# Altium PCB 20200902shidu.PcbDoc
Units mm, origin at the board's own origin, x right, y up, seen from the top; angles counter-clockwise.
Board outline 152.4 x 101.6 mm, 2 copper layers (Top Layer, Bottom Layer); 71 components, 55 nets, 213 pads, 23 vias.
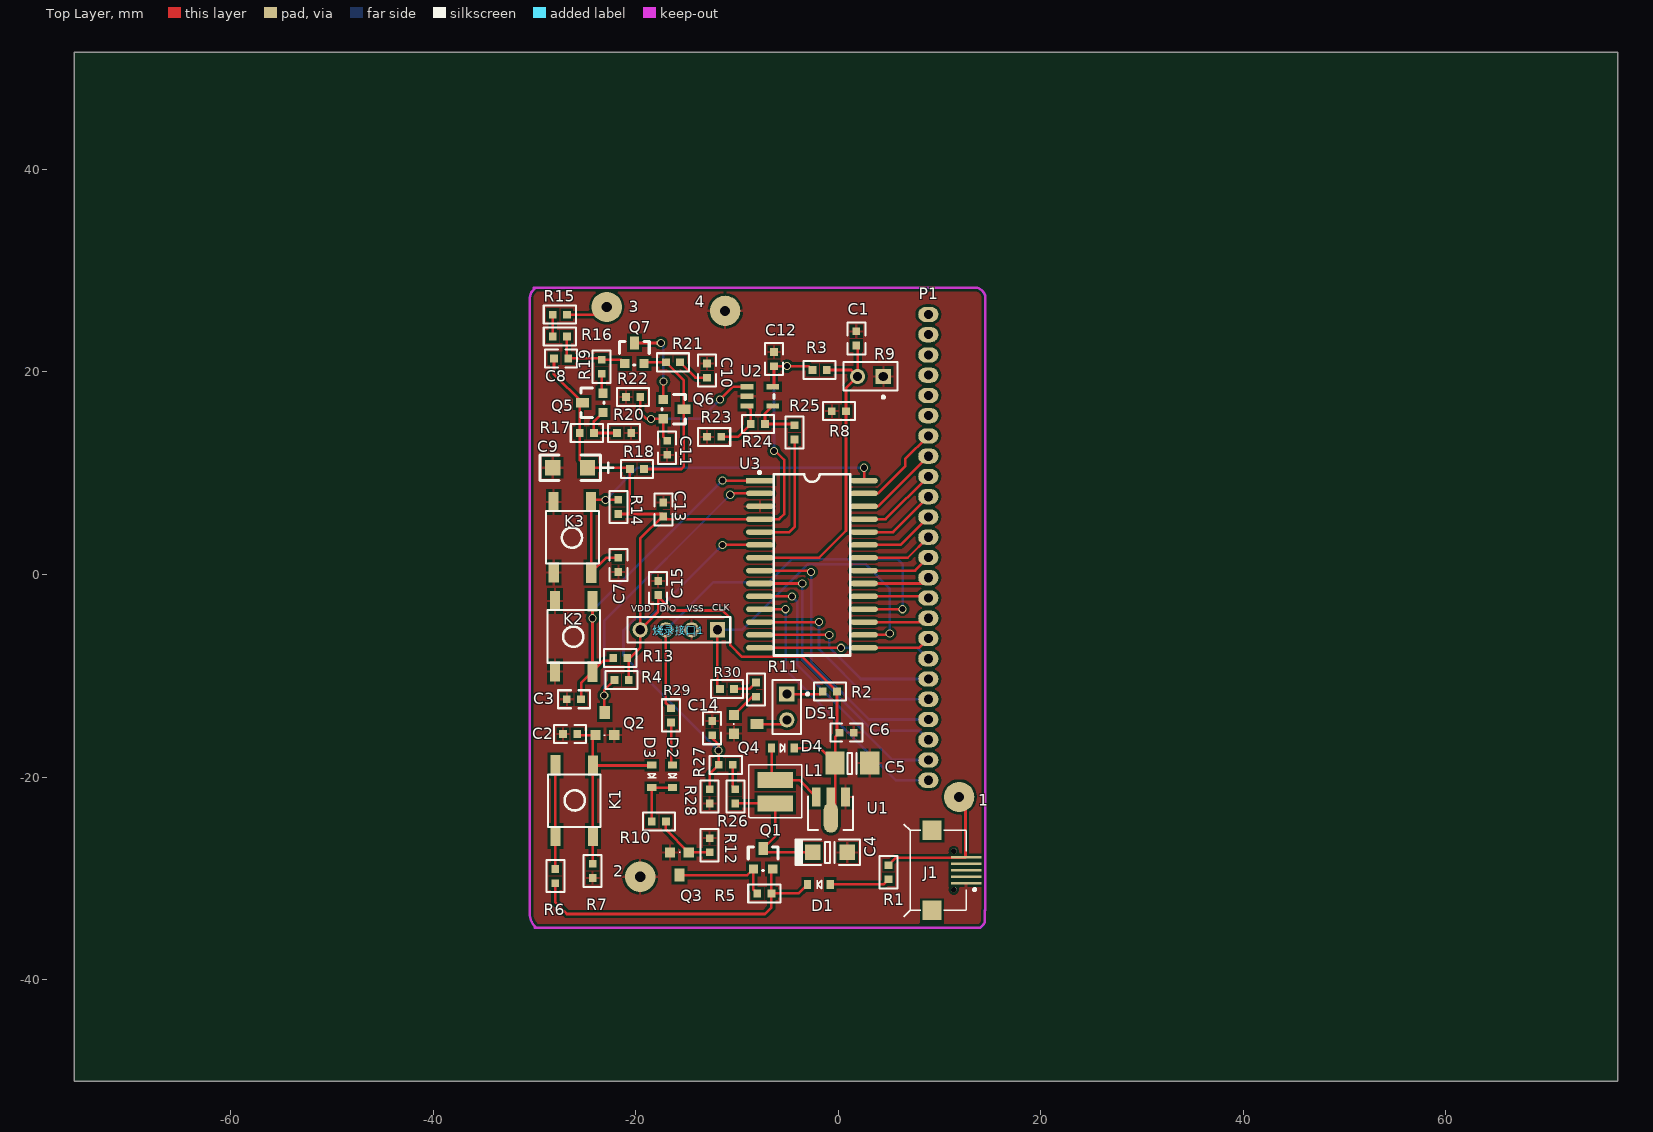
[diagram p0: Top Layer view]
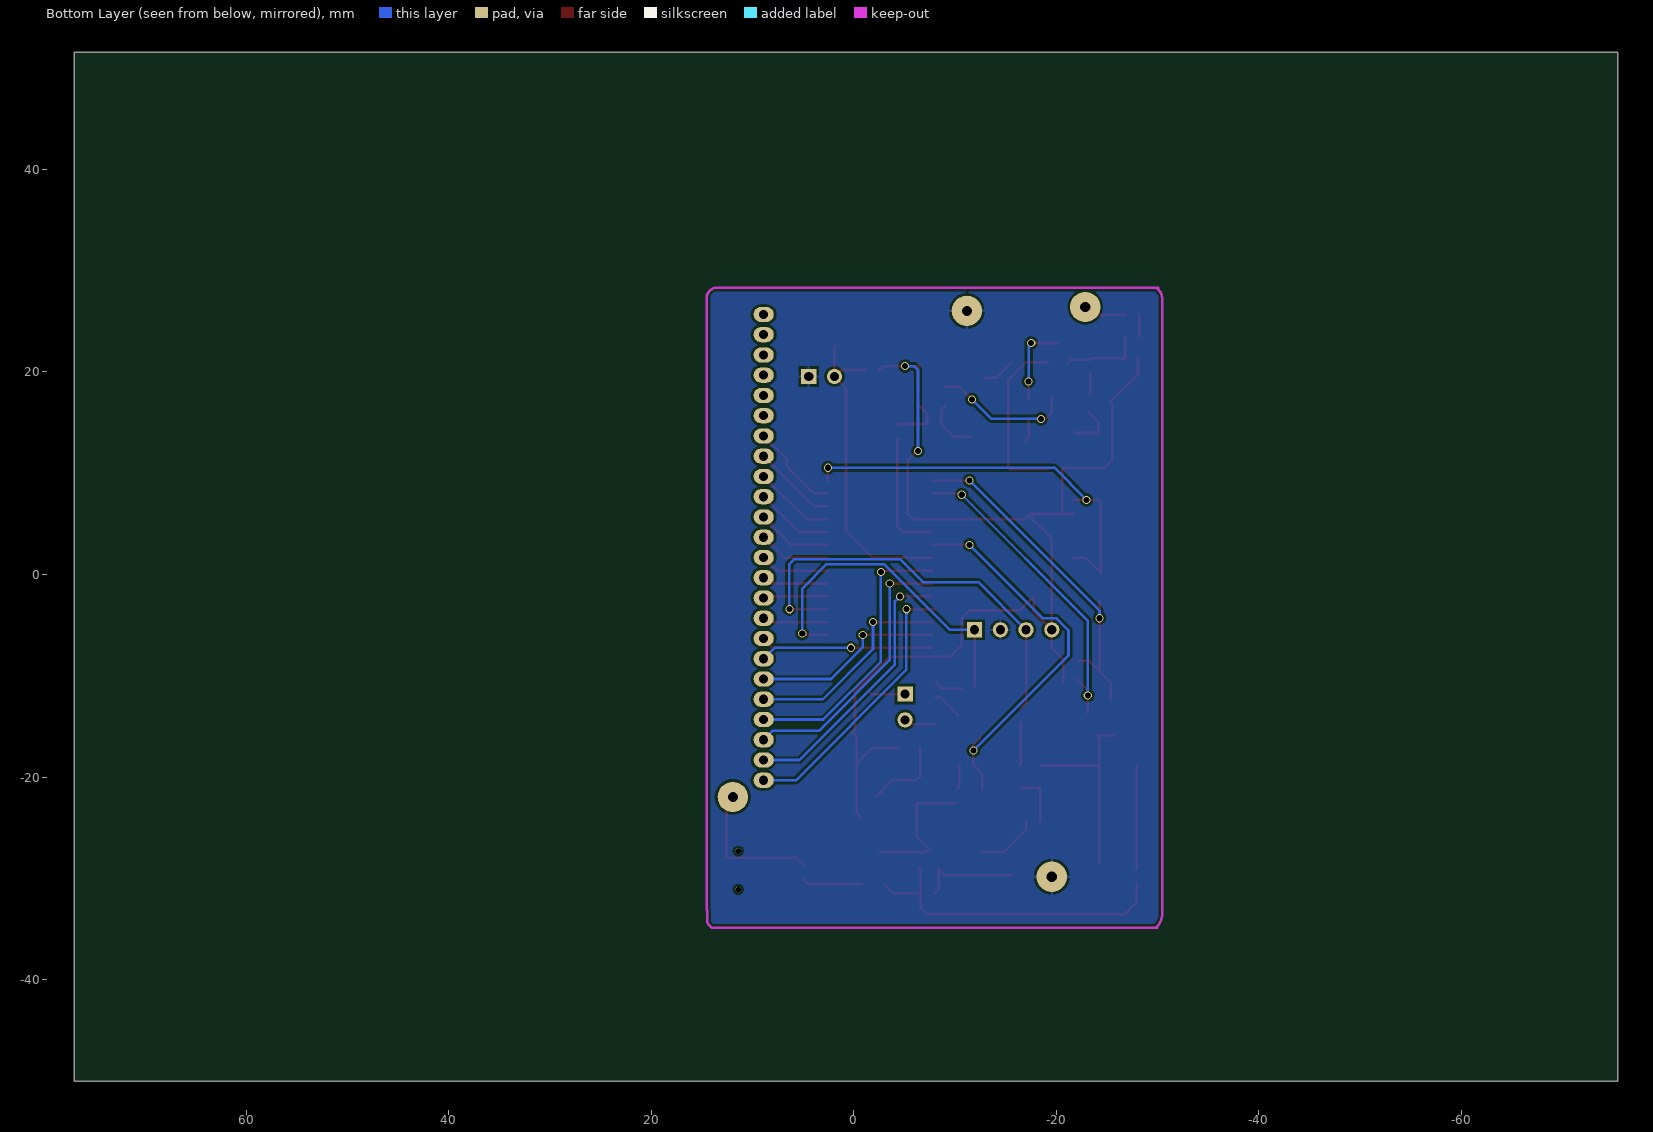
[diagram p1: Bottom Layer view, seen from below]

## Layer stack, top to bottom
Top Layer: signal copper 0.0356
Dielectric: dielectric 0.32, FR-4, Dk 4.8
Bottom Layer: signal copper 0.0356

## Board outline
-75.438,-50.038 76.962,-50.038 76.962,51.562 -75.438,51.562

## Design rules (kind name [scope] priority, off if disabled: settings)
Clearance [All] p1: gap=0.254
FabricationTestPointUsage TestPointUsage [All] p1: valid=0 allowmultiple=FALSE
FabricationTestpoint Testpoint [All] p1: side=3 testpointundercomponent=TRUE minsize=1.016 maxsize=2.54 preferedsize=1.524 minholesize=0 maxholesize=1.016 preferedholesize=0.813 testpointgrid=0.025 allowsidetop=TRUE allowsidebottom=TRUE usegrid=TRUE gridtolerance=0
PolygonConnect [All] p1: connectstyle=Relief reliefconductorwidth=0.254 reliefentries=4 polygonreliefangle="90 Angle" airgapwidth=0.254
RoomDefinition 20200831shidu [InComponentClass('20200831shidu')] p1: confinementstyle=ConfineIn formatcopy=TRUE lockcomponents=FALSE outline -100.838,-75.438 -50.038,-75.438 -50.038,-50.038 -100.838,-50.038
RoutingVias [All] p1: holewidth=0.508 width=0.762 viastyle="Through Hole" minholewidth=0.508 minwidth=0.762 maxholewidth=0.711 maxwidth=1.27
SolderMaskExpansion [All] p1: expansion=0.102
Width [All] p1: maxlimit=0.762 minlimit=0.254 preferedwidth=0.254
26 further rules are at their usual default settings.

## Components (designator, comment, footprint, x,y, rotation, side; value= is the part's Value field where it differs from the comment)
1 "" PADD 11.938,-21.971 r90 top
2 "" PADD -19.558,-29.845 r90 top
3 "" PADD -22.86,26.416 r90 top
4 "" PADD -11.176,26.035 r90 top
C1 "100nF" c0603 1.778,23.749 r180 top
C2 "100nF" c0603 -26.924,-15.748 r270 top
C3 "100nF" c0603 -26.543,-12.319 r270 top
C4 "106/16V" 1206C-T -2.54,-27.432 r0 top
C5 "107/16V" 3528B 1.524,-18.542 r90 top
C6 "100nF" c0603 1.27,-15.621 r90 top
C7 "100nF" c0603 -21.717,0.508 r0 top
C8 "4.7nF" c0603 -27.813,21.336 r270 top
C9 "106" 1206C -24.765,10.541 r180 top
C10 "101" c0603 -12.954,19.685 r0 top
C11 "47nf" c0603 -16.891,12.954 r180 top
C12 "100nF" c0603 -6.35,20.828 r0 top
C13 "100nF" c0603 -17.272,6.858 r180 top
C14 "100nF" c0603 -12.446,-14.732 r180 top
C15 "100nF" c0603 -17.78,-0.889 r180 top
D1 "B5819ws" SOD-323_B5819WS -1.905,-30.607 r180 top
D2 "B5819ws" SOD-323_B5819WS -16.383,-19.939 r270 top
D3 "B5819ws" SOD-323_B5819WS -18.415,-19.939 r270 top
D4 "SS14" SOD-323_B5819WS -5.461,-17.145 r0 top
DS1 "Lamp" PIN2 -5.08,-11.811 r270 top
J1 "Micro USB" Micro_USB 7.112,-29.21 r180 top
K1 "POWER" AN4*4-SMD -26.035,-22.225 r180 top
K2 "POWER" AN4*4-SMD -26.162,-6.223 r0 top
K3 "POWER" AN4*4-SMD -26.289,3.556 r0 top
L1 "10uH" "CD32 - duplicate" -6.223,-22.606 r90 top
P1 "Header 17" 24p-2.0 8.89,-20.32 r90 top
Q1 "2SA812" SOT-23 -8.382,-29.083 r0 top
Q2 "9013" SOT-23_S9013_J3_NPN -22.987,-14.986 r90 top
Q3 "S9013" SOT-23_S9013_J3_NPN -15.748,-28.321 r270 top
Q4 "S9013" SOT-23_S9013_J3_NPN -9.398,-14.859 r0 top
Q5 "2SC1623" SOT-23 -23.241,16.002 r90 top
Q6 "2SC1623" SOT-23 -17.272,17.272 r270 top
Q7 "2SA812" SOT-23 -21.082,20.828 r0 top
R1 "0" 0603R 4.953,-30.099 r90 top
R2 "50R" 0603R -0.127,-11.557 r180 top
R3 "100K  1%" 0603R -2.54,20.193 r0 top
R4 "300k" 0603R -20.701,-10.414 r180 top
R5 "300K" 0603R -8.001,-31.496 r0 top
R6 "20k" 0603R -27.94,-29.083 r270 top
R7 "100k" 0603R -24.257,-29.972 r90 top
R8 "100K 1%" 0603R 0.762,16.129 r180 top
R9 "NTC" PIN2 4.445,19.558 r180 top
R10 "10K" 0603R -17.018,-24.384 r180 top
R11 "100k" 0603R -8.128,-12.065 r90 top
R12 "300K" 0603R -12.7,-26.035 r270 top
R13 "100k" 0603R -20.828,-8.255 r180 top
R14 "100k" 0603R -21.717,5.969 r90 top
R15 "9.1K  1%" 0603R -28.194,25.654 r0 top
R16 "20K 1%" 0603R -26.797,23.495 r180 top
R17 "240R" 0603R -24.13,13.97 r180 top
R18 "10K" 0603R -19.177,10.414 r180 top
R19 "1K 1%" 0603R -23.368,19.812 r90 top
R20 "5.1K" 0603R -20.447,13.97 r180 top
R21 "0R" 0603R -17.018,20.955 r0 top
R22 "15K" 0603R -19.558,17.526 r180 top
R23 "20K  1%" 0603R -11.557,13.589 r180 top
R24 "10K 1%" 0603R -7.239,14.859 r180 top
R25 "0R" 0603R -4.318,13.335 r90 top
R26 "300K" 0603R -10.16,-21.209 r270 top
R27 "300K" 0603R -11.811,-18.796 r0 top
R28 "100K" 0603R -12.7,-22.606 r90 top
R29 "0" 0603R -16.51,-14.605 r90 top
R30 "0" 0603R -10.287,-11.303 r180 top
U1 "QX2303L50E" SOT-89 -0.762,-23.368 r0 top
U2 "LM321" SOT-25_ -6.477,16.637 r90 top
U3 "SC92F7543M28U" SOP-28 -7.747,9.271 r0 top
烧录接口1 "Header 4" HDR1X4 -11.938,-5.461 r180 top

## Footprints (in the part's own frame and the unit in brackets; to place one, negate y for a bottom-side part, rotate by r counter-clockwise, add the part's x,y. Pads: shape width x height; smd on the part's side, far side on the other; paste and mask are expansions set on the pad)
24p-2.0 [mm]
  oval 1.5x2 hole 0.9: 1(0,0) 2(2,0) 3(4,0) 4(6,0) 5(8,0) 6(10,0) 7(12,0) 8(14,0) 9(16,0) 10(18,0) 11(20,0) 12(22,0) 13(24,0) 14(26,0) 15(28,0) 16(30,0) 17(32,0) 18(34,0) 19(36,0) 20(38,0) 21(40,0) 22(42,0) 23(44,0) 24(46,0)
0603R [mil]
  rect 30x30 smd: 1(0,0) 2(55,0)
  silkscreen extent -35,-35 90,35
1206C [mil]
  rect 60x60 smd: 1(0,0) 2(135,0)
  silkscreen extent -100,-50 185,50
1206C-T [mil]
  rect 60x60 smd: 1(-0.04,-0.04) 2(134.96,-0.04)
  silkscreen extent -67,-50 185,50
3528B [mm]
  rect 2.28x1.9 smd: 1(-0.082,1.839) 2(-0.082,-1.581)
  silkscreen extent -1.16,-0.28 0.93,0.63
AN4*4-SMD [mm]
  rect 1x2 smd: 1(1.89,3.59) 1(1.896,-3.376) 2(-1.814,3.603) 2(-1.808,-3.363)
  silkscreen extent -2.56,-2.49 2.64,2.71
c0603 [mil]
  rect 30x30 smd: 1(0.04,44.96) 2(0.04,-10.04)
  silkscreen extent -35,-45 35,80
"CD32 - duplicate" [mm]
  rect 1.6x3.5 smd: 1(0,0) 2(2.3,0)
  silkscreen extent -1.41,-2.62 3.83,2.6
HDR1X4 [mm] "Connector; Header; 4 Position"
  rect 1.5x1.5 hole 0.9: 1(0,0)
  round 1.5 hole 0.9: 2(2.54,0) 3(5.08,0) 4(7.62,0)
  silkscreen extent -1.27,-1.27 8.89,1.27
Micro_USB [mm] "5P 贴片 带定位柱"
  rect 3x0.25 smd: 1(-5.508,1.3) 2(-5.508,0.65) 3(-5.508,0) 4(-5.508,-0.65) 5(-5.508,-1.3)
  round 0.55 hole 0.55 unplated: MH1(-4.3,1.9) MH2(-4.3,-1.9)
  rect 1.9x1.9 smd: ""(-2.15,3.95) ""(-2.15,-3.95)
  silkscreen extent -6.47,-4.57 0.63,4.57
PADD [mm]
  round 3 hole 1: 1(0,0)
PIN2 [mm] "Photosensitive Diode; 2 Leads"
  rect 1.5x1.5 hole 0.9: 1(0,0)
  round 1.5 hole 0.9: 2(2.54,0)
  silkscreen extent -1.4,-1.4 3.94,2.18
SOD-323_B5819WS [mm]
  rect 0.7x0.9 smd: 1(-1.115,0) 2(1.115,0)
  silkscreen extent -0.25,-0.41 0.15,0.43
SOP-28 [mm]
  rect 2.7x0.55 smd: 1(0,0)
  oval 2.7x0.55 smd: 2(0,-1.27) 3(0,-2.54) 4(0,-3.81) 5(0,-5.08) 6(0,-6.35) 7(0,-7.62) 8(0,-8.89) 9(0,-10.16) 10(0,-11.43) 11(0,-12.7) 12(0,-13.97) 13(0,-15.24) 14(0,-16.51) 15(10.3,-16.51) 16(10.3,-15.24) 17(10.3,-13.97) 18(10.3,-12.7) 19(10.3,-11.43) 20(10.3,-10.16) 21(10.3,-8.89) 22(10.3,-7.62) 23(10.3,-6.35) 24(10.3,-5.08) 25(10.3,-3.81) 26(10.3,-2.54) 27(10.3,-1.27) 28(10.3,0)
  silkscreen extent -0.14,-17.27 8.92,0.92
SOT-23 [mil]
  rect 36x36 smd: 1(0,0) 2(75,0)
  rect 36x50 smd: 3(38,80)
  silkscreen extent -20,-5 95,85
SOT-23_S9013_J3_NPN [mm]
  rect 1x1 smd: B(-0.881,0.981) E(-0.881,-0.863)
  rect 1.3x1 smd: C(1.369,0.077)
  silkscreen extent -0.91,0.03 -0.91,0.15
SOT-25_ [mil]
  rect 20x50 smd: 1(75,100) 2(38,100) 3(0,100) 4(0,0) 5(75,0)
  silkscreen extent 30,-5 45,-5
SOT-89 [mil] "3A"
  rect 34x75 smd: 1(58.06,55.19) 2(1.06,55.19) 3(-55.94,55.19)
  oval 55.12x118.11 smd: 2(1.06,-24.81)
  silkscreen extent -87,-74 88,56

## Part data
1 2 3 4: library part CON1, "Connector"
C1 C2 C3 C6 C7 C8 C10 C11 C12 C13 C14 C15: library part CAP, "Capacitor"
C4: library part ELECTRO1, "Electrolytic Capacitor"
C5: library part CAP-TYPE1
C9: library part CAPACITOR, "Capacitor"
D1 D2 D3 D4: library part "Diode 11DQ03", "Schottky Rectifier"
DS1: "Incandescent Bulb"
J1: library part USB_AB
K1 K2 K3: library part SW-PB
L1: library part "Inductor Iron", "Magnetic-Core Inductor"
P1: "Header, 17-Pin"
Q1 Q7: library part PNP, "PNP Transistor"
Q2: library part 2N3904, "NPN General Purpose Amplifier"
Q3 Q4 Q5 Q6: library part NPN, "NPN Transistor"
R1 R15 R16 R17 R18 R19 R20 R21 R22 R23 R24 R25 R26 R27 R28 R29 R30: library part RES1
R2 R3 R4 R5 R6 R7 R8 R10 R11 R12 R13 R14: library part RES, "Resistor"
R9: library part "Res Adj2", "Variable Resistor"
U1: library part MCC6288
U2: library part LVM321
U3: library part SC92F7547
烧录接口1: "Header, 4-Pin"

## Via types
v1: diameter 0.8, hole 0.6, Top Layer to Bottom Layer, 23 vias

## Nets (pads, with @x,y where several pads share a name; then routed paths per layer and width w, separated by ;. In a path a pad name is that pad's centre, name@x,y a point inside that pad or via, vN(x,y) a via of type N, cw(c..) or ccw(c..) an arc to the next point about the centre after c; other vN are vias at no path point)
BAT3V: 1.1 J1.5 R1.2 | length 14.2
  Top Layer w0.254: R1.2 5.689,-27.966 12.564,-27.966 12.564,-22.597 1.1
BAT(ADC): C14.1 R27.1 R28.2 U3.6 | length 38.4
  Top Layer w0.254: R28.2 -12.7,-19.685 R27.1 v1(-11.811,-17.399) -11.811,-16.764 C14.1@-12.447,-16.128 ; v1(-11.43,2.921) U3.6
  Bottom Layer w0.254: v1(-11.811,-17.399) -21.209,-8.001 -21.209,-5.513 -20.026,-4.33 -18.681,-4.33 v1(-11.43,2.921)
BL_LED: R11.2 R30.1 | length 2.7
  Top Layer w0.254: R30.1@-10.541,-11.303 -8.763,-11.303 R11.2
COM1: P1.1 U3.11 | length 27.4
  Top Layer w0.254: U3.11@-8.001,-3.429 U3.11 v1(-5.207,-3.429)
  Bottom Layer w0.254: v1(-5.207,-3.429) -5.207,-9.398 5.715,-20.32 P1.1
COM2: P1.2 U3.10 | length 27
  Top Layer w0.254: U3.10 v1(-4.572,-2.159)
  Bottom Layer w0.254: v1(-4.572,-2.159) -4.064,-2.667 -4.064,-8.89 5.366,-18.32 P1.2
COM3: P1.3 U3.9 | length 27.5
  Top Layer w0.254: U3.9 v1(-3.556,-0.889)
  Bottom Layer w0.254: v1(-3.556,-0.889) -3.556,-8.465 3.43,-15.451 8.021,-15.451 P1.3
COM4: P1.4 U3.8 | length 28.2
  Top Layer w0.254: U3.8 v1@-2.54,0.381
  Bottom Layer w0.254: v1@-2.54,0.381 v1(-2.686,0.235) -2.686,-8.617 3.017,-14.32 P1.4
HARDWARE_POWER: C2.1 D3.1 K1.2 Q2.B R7.2 | length 20.5
  Top Layer w0.254: C2.1 -25.664,-15.867 Q2.B -24.227,-16.126 K1.2@-24.227,-18.862 ; R7.2 -24.257,-25.864 -24.221,-25.828 -24.227,-25.822 K1.2@-24.227,-18.862 ; D3.1 -18.453,-18.862 K1.2@-24.227,-18.862
K1(POWER): Q2.C R4.2 U3.2 | length 31.6
  Top Layer w0.254: Q2.C -23.114,-13.567 v1(-23.114,-11.938) -23.114,-11.43 R4.2 ; v1(-10.668,7.874) -10.541,8.001 U3.2
  Bottom Layer w0.254: v1(-23.114,-11.938) -23.114,-4.572 v1(-10.668,7.874)
K2(HOLD): C3.1 K2.1 R13.2 U3.1 | length 35.2
  Top Layer w0.254: C3.1 -25.401,-10.734 K2.1@-24.266,-9.599 ; K2.1@-24.272,-2.633 -24.266,-2.639 v1(-24.266,-4.318) K2.1@-24.266,-9.599 ; R13.2@-22.225,-8.509 -23.176,-8.509 K2.1@-24.266,-9.599 ; v1(-11.43,9.271) U3.1
  Bottom Layer w0.254: v1(-24.266,-4.318) -24.266,-3.565 v1(-11.43,9.271)
K3(MODE): C7.1 K3.1 R14.2 U3.28 | length 41.1
  Top Layer w0.254: R14.2 v1(-22.987,7.366) -24.179,7.366 -24.399,7.146 -24.393,7.14 -24.393,0.18 -22.923,1.65 C7.1 ; v1(2.54,10.541) 2.553,10.528 U3.28
  Bottom Layer w0.254: v1(-22.987,7.366) -19.812,10.541 v1(2.54,10.541)
Net3_1: 3.1 R15.2 | length 4.1
  Top Layer w0.254: R15.2 -23.241,25.654 3.1@-22.86,26.035
NetC8_1: C8.1 Q7.1 R16.1 R19.2 | length 8
  Top Layer w0.254: R16.1 -26.797,21.461 C8.1 -23.494,21.335 R19.2 -21.463,21.209 Q7.1
NetC10_2: C10.2 R21.2 | length 3.3
  Top Layer w0.254: R21.2 -14.096,19.43 C10.2
NetC11_2: C11.2 Q6.2 R22.1 U2.1 | length 17.2
  Top Layer w0.254: R22.1 -19.558,16.002 -18.923,15.367 v1(-18.479,15.367) Q6.2 -17.272,13.589 C11.2 ; v1(-11.684,17.272) -10.414,18.542 U2.1
  Bottom Layer w0.254: v1(-18.479,15.367) -13.589,15.367 v1(-11.684,17.272)
NetD1_1: D1.1 R1.1 | length 6
  Top Layer w0.254: D1.1 4.445,-30.607 R1.1
NetD2_2: D2.2 D3.2 R10.2 | length 5.4
  Top Layer w0.254: R10.2 D3.2 D2.2
NetD4_1: D4.1 L1.2 U1.3 | length 8
  Top Layer w0.254: D4.1 -6.576,-19.953 L1.2 -3.843,-20.306 U1.3
NetDS1_1: DS1.1 R2.2 | length 3.7
  Top Layer w0.254: DS1.1 -1.778,-11.811 R2.2
NetDS1_2: DS1.2 Q4.C | length 3.1
  Top Layer w0.254: Q4.C -5.511,-14.782 DS1.2
NetK1_1: K1.1 R6.1 | length 10.2
  Top Layer w0.254: R6.1 -27.94,-25.83 -27.931,-25.821 K1.1@-27.931,-18.849
NetQ1_1: Q1.1 Q3.C R5.1 | length 10.1
  Top Layer w0.254: Q3.C -8.989,-29.69 Q1.1 -8.382,-31.115 R5.1
NetQ3_B: Q3.B R10.1 R12.2 | length 6.1
  Top Layer w0.254: R10.1 -17.018,-25.189 Q3.B -12.708,-27.44 R12.2
NetQ4_B: Q4.B R11.1 | length 2.9
  Top Layer w0.254: Q4.B -8.466,-12.065 R11.1
NetQ5_1: Q5.1 R17.1 R20.2 | length 4.7
  Top Layer w0.254: Q5.1 -24.13,15.113 R17.1 R20.2
NetQ5_2: Q5.2 R19.1 | length 2
  Top Layer w0.254: R19.1 -23.368,18.034 Q5.2
NetQ6_1: Q6.1 Q7.3 | length 8.3
  Top Layer w0.254: Q7.3 v1(-17.526,22.86) ; Q6.1 v1(-17.272,19.05)
  Bottom Layer w0.254: v1(-17.526,22.86) -17.272,22.606 v1(-17.272,19.05)
NetR15_1: R15.1 R16.2 | length 2.2
  Top Layer w0.254: R16.2 R15.1
NetR23_1: R23.1 R24.2 U2.3 | length 5.4
  Top Layer w0.254: R23.1 -9.906,13.589 R24.2 -8.636,16.256 U2.3
NetR24_1: R24.1 R25.2 U2.4 | length 5.1
  Top Layer w0.254: U2.4 -7.239,15.875 R24.1 -4.445,14.859 R25.2
NetR26_1: R26.1 R27.2 | length 2.5
  Top Layer w0.254: R27.2 -10.414,-20.955 R26.1
NTC(ADC): C1.1 R3.2 R8.1 R9.2 U3.7 | length 31.7
  Top Layer w0.254: U3.7 -1.905,1.651 0.762,4.318 R8.1 0.762,18.415 R9.2 ; R3.2 1.27,20.193 R9.2 ; C1.1 1.905,22.479 R9.2
S0: P1.5 U3.12 | length 21.4
  Top Layer w0.254: U3.12 v1(-1.905,-4.699)
  Bottom Layer w0.254: v1(-1.905,-4.699) -1.905,-7.367 3.048,-12.32 P1.5
S1: P1.6 U3.13 | length 19.2
  Top Layer w0.254: U3.13 v1(-0.889,-5.969)
  Bottom Layer w0.254: v1(-0.889,-5.969) -0.889,-7.201 2.23,-10.32 P1.6
S2: P1.7 U3.14 | length 17.1
  Top Layer w0.254: U3.14 v1(0.254,-7.239)
  Bottom Layer w0.254: v1(0.254,-7.239) 7.809,-7.239 P1.7
S3: P1.8 U3.15 | length 6.7
  Top Layer w0.254: U3.15 7.971,-7.239 P1.8
S4: P1.9 U3.17 | length 6.5
  Top Layer w0.254: U3.17 8.511,-4.699 P1.9
S5: P1.10 U3.19 | length 6.4
  Top Layer w0.254: U3.19 8.729,-2.159 P1.10
S6: P1.11 U3.20 | length 6.6
  Top Layer w0.254: U3.20 8.321,-0.889 P1.11
S7: P1.12 U3.21 | length 6.9
  Top Layer w0.254: U3.21 7.591,0.381 P1.12
S8: P1.13 U3.22 | length 7.2
  Top Layer w0.254: U3.22 6.861,1.651 P1.13
S9: P1.14 U3.23 | length 7.5
  Top Layer w0.254: U3.23 6.131,2.921 P1.14
S10: P1.15 U3.24 | length 7.8
  Top Layer w0.254: U3.24 5.401,4.191 P1.15
S11: P1.16 U3.25 | length 8.1
  Top Layer w0.254: U3.25 4.671,5.461 P1.16
S12: P1.17 U3.26 | length 8.4
  Top Layer w0.254: U3.26 3.941,6.731 P1.17
S13: U3.27 | length 9.1
  Top Layer w0.254: U3.27 3.937,8.001 6.604,10.668 6.604,11.394 8.89,13.68
SIGNAL(ADC): R25.1 U3.5 | length 12.3
  Top Layer w0.254: U3.5 -4.826,4.191 -4.318,4.699 R25.1
SOFT_POWER: D2.1 R29.1 | length 4.3
  Top Layer w0.254: R29.1 -16.51,-18.697 D2.1
TCK: R30.2 U3.16 烧录接口1.1 | length 33.3
  Top Layer w0.254: R30.2@-11.938,-11.049 烧录接口1.1 ; U3.16 4.953,-5.969 v1(5.08,-5.842)
  Bottom Layer w0.254: 烧录接口1.1 -9.487,-5.461 -3.01,1.016 2.667,1.016 5.08,-1.397 v1(5.08,-5.842)
TDIO: R29.2 U3.18 烧录接口1.3 | length 42.7
  Top Layer w0.254: 烧录接口1.3 -17.018,-12.7 R29.2 ; U3.18 v1(6.35,-3.429)
  Bottom Layer w0.254: 烧录接口1.3 -12.319,-0.762 -6.858,-0.762 -4.572,1.524 5.842,1.524 6.35,1.016 v1(6.35,-3.429)
VB: D1.2 Q1.2 R5.2 R6.2 | length 31.8
  Top Layer w0.254: R6.2 -27.94,-32.385 -26.797,-33.528 -7.239,-33.528 -6.604,-32.893 R5.2 ; Q1.2 -6.604,-29.21 R5.2 ; D1.2 -3.909,-31.496 R5.2
VBB: C4.1 L1.1 Q1.3 R26.2 | length 13.9
  Top Layer w0.254: R26.2 L1.1 -6.223,-25.857 Q1.3 -7.035,-27.433 C4.1
"VCC Q6Q7": Q6.3 Q7.2 R18.1 R21.1 | length 17.3
  Top Layer w0.254: R18.1 -15.494,10.414 -15.24,10.668 Q6.3 -15.24,19.177 R21.1 -19.05,20.955 Q7.2
"VDD 5V": C5.1 C6.1 C8.2 C9.1 C12.2 C13.1 C15.1 D4.2 Q5.3 R2.1 R3.1 R4.1 R13.1 R14.1 R17.2 R18.2 U1.2 U2.5 U3.4 烧录接口1.4 | length 122.4
  Top Layer w0.254: C8.2 -28.068,19.762 Q5.3 -25.527,16.713 R17.2 -25.527,11.303 C9.1 -20.701,10.541 R18.2 -20.574,5.969 ; R14.1 -20.574,5.969 ; R4.1@-20.701,-10.668 -20.701,-8.382 -19.558,-7.239 烧录接口1.4 ; C13.1@-17.399,5.969 -20.574,5.969 ; U2.5 -6.349,18.67 C12.2 -2.92,20.573 R3.1 ; v1@-6.223,12.192 -5.334,11.303 -5.334,5.969 -5.842,5.461 U3.4 -16.891,5.461 -17.273,5.843 -19.558,3.558 烧录接口1.4 ; D4.2 -1.794,-17.145 C5.1 ; U1.2@-0.735,-23.998 -0.315,-23.578 C5.1 ; 烧录接口1.4 -17.781,-3.684 -17.781,-2.158 -16.383,-3.556 -11.43,-3.556 -10.668,-4.318 -10.668,-6.985 -9.525,-8.128 -3.556,-8.128 R2.1 -0.127,-15.365 C6.1 -0.315,-16.063 C5.1
  Bottom Layer w0.254: v1(-6.35,12.192) -6.35,20.193 -5.969,20.574 v1(-5.08,20.574)
VSS: 2.1 4.1 C1.2 C2.2 C3.2 C4.2 C5.2 C6.2 C7.2 C9.2 C10.1 C11.1 C12.1 C13.2 C14.2 C15.2 J1.1 K2.2 K3.2 Q2.E Q3.E Q4.E R7.1 R8.2 R9.1 R12.1 R20.1 R22.2 R23.2 R28.1 U1.1 U2.2 U3.3 烧录接口1.2
pads on no net: J1. J1.2 J1.3 J1.4 J1.MH1 J1.MH2 P1.18 P1.19 P1.20 P1.21 P1.22 P1.23 P1.24

## Polygon pours and split planes (outlines as drawn)
VSS on Top Layer "Top Layer-No Net" (solid, pour order 4): 14.605,-34.925 -29.464,-34.925 -30.734,-33.655 -30.734,27.94 -30.353,28.321 -29.972,28.702 14.605,28.702 14.605,-34.925
VSS on Bottom Layer "Top Layer-No Net" (solid, pour order 6): 14.605,-34.925 -30.226,-34.925 -30.48,-34.671 -30.48,28.194 14.605,28.194 14.605,-34.925

## Keep-outs
Keep-Out Layer:
  lines w0.254: -30.48,-33.223 -30.48,27.153 cw(c-29.07,27.153) -30.067,28.15 ; -30.48,-33.03 -30.48,-33.448 ccw(c-28.545,-33.448) -29.913,-34.816 ; -30.07,28.175 cw(c-29.718,27.824) -29.718,28.321 ; -30.067,28.296 13.716,28.296 cw(c13.473,27.269) 14.5,27.026 14.5,-33.172 ; -29.972,-34.874 10.617,-34.874 14.021,-34.874 14.298,-34.597 ccw(c13.865,-34.163) 14.478,-34.163 14.478,-33.172

## Silkscreen, mask and mechanical layers (free items; w line width, h text height)
Top Overlay:
  text "CLK" at -12.446,-3.81 h1.1
  text "VDD" at -20.447,-3.937 h1.1
  text "DIO" at -17.653,-3.937 h1.1
  text "VSS" at -14.986,-3.937 h1.1